# EAGLE board red_led (EAGLE 6.4)
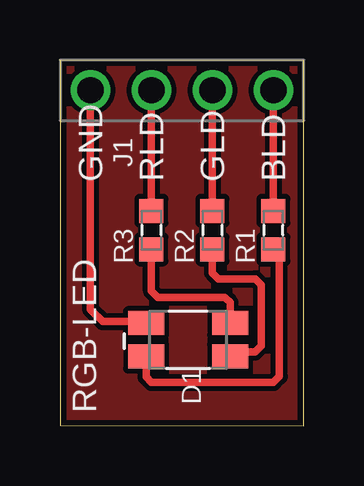
[diagram p0: board, top side]
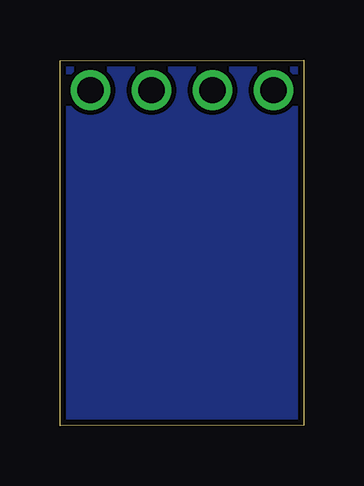
[diagram p1: board, bottom side, seen from below]

Size 10.16 x 15.26 mm. Coordinates in mm from the lower left corner, seen from the top.
Outline: 0,0.03 10.16,0 10.16,15.23 0,15.26 0,0.03
Copper layers (1*16): Top 0.035mm / dielectric 1.5mm / Bottom 0.035mm
Design rules "default *": minimum track width 10mil, minimum drill 24mil, track to track 8mil, track to pad 8mil, pad to pad 8mil, via to via 8mil, smd to smd 8mil, copper to edge 10mil, drill to drill 8mil, minimum pad ring 10mil, minimum via ring 8mil, stop-mask expansion 4mil, vias tented up to drill 0mil, thermal gap 10mil

## Footprints (pad centres in the part's own frame; a part is rotated, then mirrored left to right if it is on the bottom)
D1210 = smd 1.5 x 1: 1 1.75,-0.7; 2 1.75,0.7; 3 -1.75,-0.7; 4 -1.75,0.7
PHSP254P1016X254X1154-4S = drill 1.1: 1 0,0; 2 2.54,0; 3 5.08,0; 4 7.62,0
RESC0603 = smd 1 x 1: P$1 0.8,0; P$2 -0.8,0

## Placement (x,y rotation side)
D1  [D1210]  5.33,3.58 180 top
J1  [PHSP254P1016X254X1154-4S]  1.27,14 0 top
R1  390  [RESC0603]  8.89,8.15 90 top
R2  390  [RESC0603]  6.35,8.15 90 top
R3  390  [RESC0603]  3.81,8.15 90 top

## Library data of the parts
D1 = bivar-smleds; AVRG-PRICE: 2.46; DATASHEET: http://www.bivar.com/Images/Cart/SM1210RGB.pdf; DESCRIPTION: LED, SMD, 1210, 4 Leads, Tri-Color, Super Red/HE Green/Super Blue, Water Clear Lens, 130 Deg Viewing Angle; DIGIKEY: 492-1243-2-ND; EAGLEUP: D1210; MOUSER: 749-SM1210RGB; NEWARK: 92C8134; OCTOPART-LINK: http://octopart.com/sm1210rgb-bivar-2191590
J1 = wurth-pin-socket-headers
R1-R3 = te-fixed-resistors; AVRG-PRICE: 0.1; DATASHEET: http://www.te.com/commerce/DocumentDelivery/DDEController?Action=showdoc&DocId=Data+Sheet%7F1773204%7FH%7Fpdf%7FEnglish%7FENG_DS_1773204_H.pdf%7F1623095-1; DESCRIPTION: Resistores de película gruesa - SMD 0603 390Ohms 1/10W 50V; EAGLEUP: RESC0603; MOUSER: 279-CRG0603F390R; OCTOPART-LINK: http://octopart.com/crg0603f390r-tyco+electronics-16077369

## Nets
+3V3: D1.1 J1.1
N$1: D1.2 R1.P$2
N$2: D1.4 R2.P$2
N$3: D1.3 R3.P$2
N$4: J1.4 R1.P$1
N$5: J1.2 R3.P$1
N$6: J1.3 R2.P$1

## Tracks (layer width: path | path; a pad name or v marks a point on that pad's centre or on a via)
+3V3
  Top 0.305: J1.1 1.27,4.85 1.78,4.34 3.52,4.34 D1.1
GND
  pour Top: 0,15.27 10.16,15.27 10.16,0.03 0,0.03
  pour Bottom: 0,15.27 10.16,15.27 10.16,0.03 0,0.03
N$1
  Top 0.305: D1.2 3.58,2.03 3.81,1.8 8.89,1.8 9.14,2.06 9.14,7.1 R1.P$2
N$2
  Top 0.305: R2.P$2 6.35,6.38 6.6,6.12 8.13,6.12 8.38,5.87 8.38,3.33 8.13,3.07 7.28,3.07 D1.4
N$3
  Top 0.305: D1.3 7.08,5.13 6.86,5.36 4.06,5.36 3.81,5.61 R3.P$2
N$4
  Top 0.305: J1.4 R1.P$1
N$5
  Top 0.305: J1.2 R3.P$1
N$6
  Top 0.305: J1.3 R2.P$1

## Text on the board
tPlace: GND | RLD | GLD | BLD | RGB-LED